# Altium PCB PCB_Prueba_1.PcbDoc
Units mm, origin at the board's own origin, x right, y up, seen from the top; angles counter-clockwise.
Board outline 250.82 x 141.67 mm, 2 copper layers (Top Layer, Bottom Layer); 203 components, 112 nets, 556 pads, 0 vias.
Unrouted connection lines stored in the file: 412.
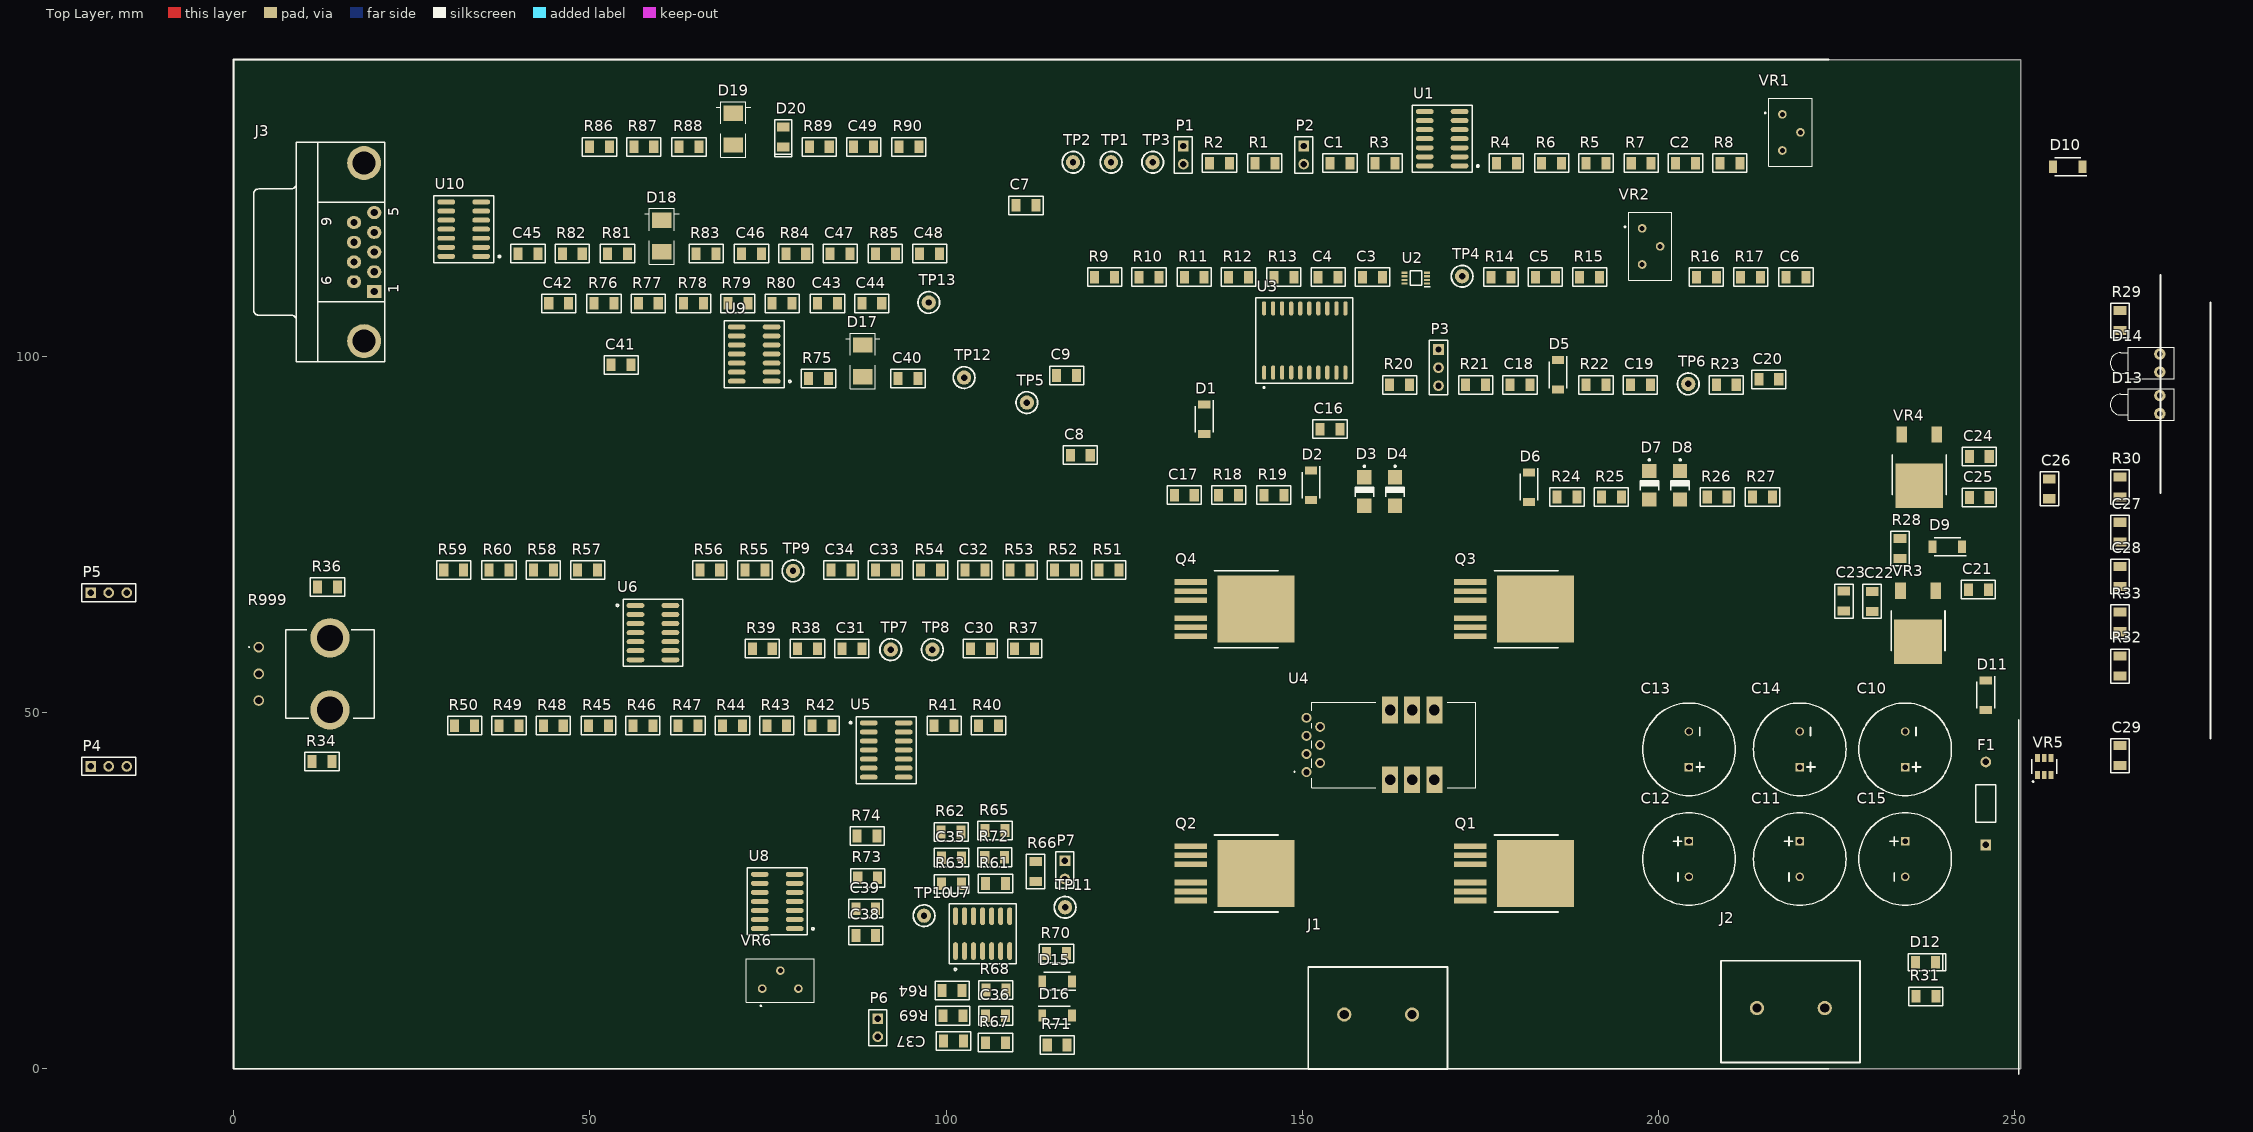
[diagram p0: Top Layer view]
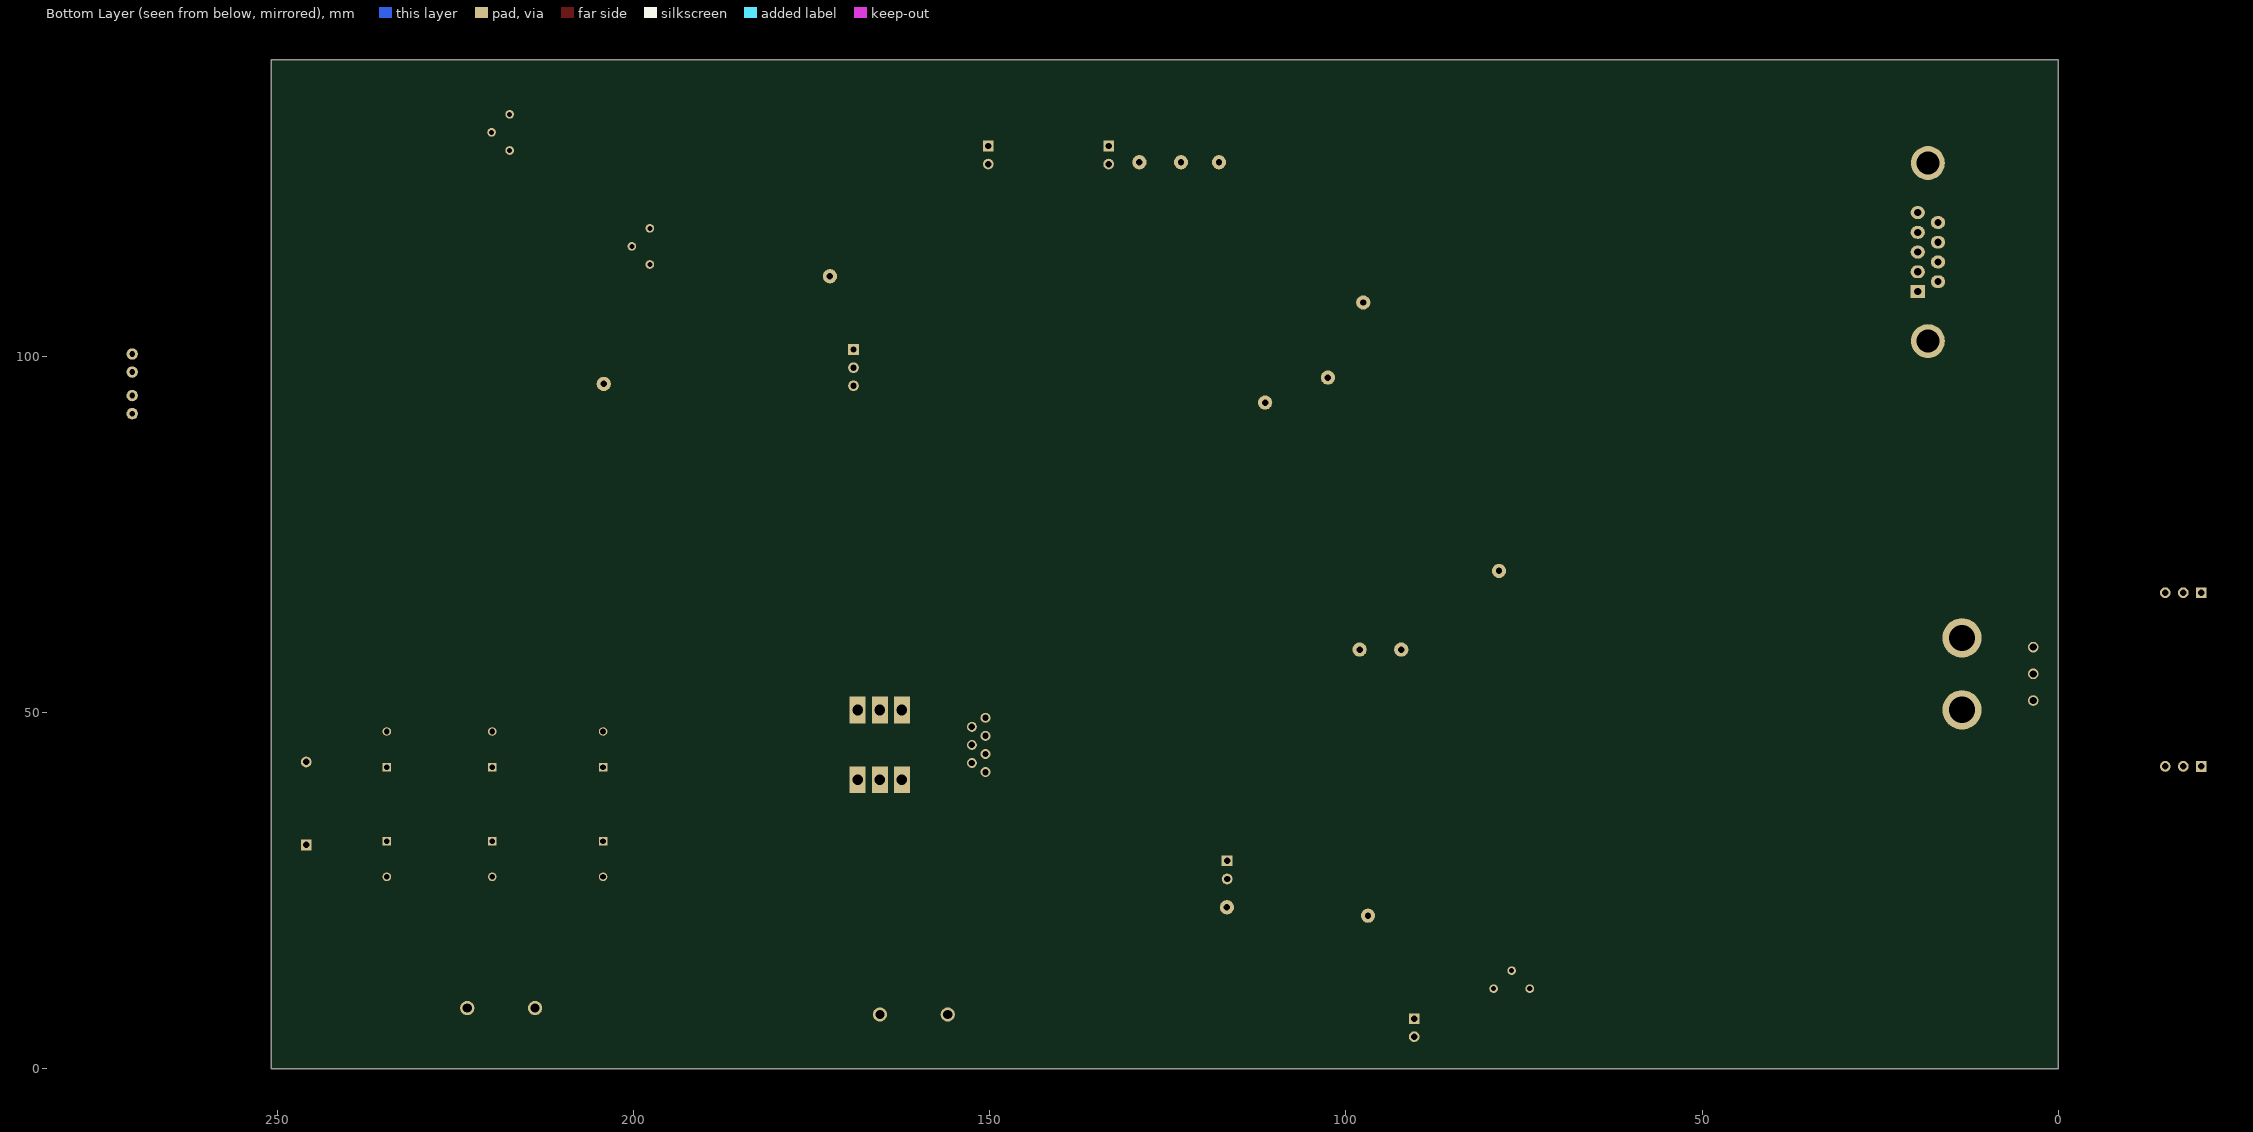
[diagram p1: Bottom Layer view, seen from below]

## Layer stack, top to bottom
Top Solder: solder mask 0.0102, Solder Resist, Dk 3.5
Top Layer: signal copper 0.0356
Dielectric 1: dielectric 0.32, FR-4, Dk 4.8
Bottom Layer: signal copper 0.0356
Bottom Solder: solder mask 0.0102, Solder Resist, Dk 3.5

## Board outline
-0.002,0 -0.002,141.668 250.823,141.668 250.823,0

## Design rules (kind name [scope] priority, off if disabled: settings)
Clearance [All] p1: gap=0.3
PolygonConnect [All] p1: connectstyle=NoConnect reliefconductorwidth=0.254 reliefentries=4 polygonreliefangle="90 Angle" airgapwidth=0.254
RoomDefinition U_Signals2uC [InComponentClass('U_Signals2uC')] p1: confinementstyle=ConfineIn formatcopy=TRUE lockcomponents=FALSE outline 104.686,139.446 0.379,139.446 0.379,87.122 104.686,87.122
RoomDefinition U_Fuentes [InComponentClass('U_Fuentes')] p2: confinementstyle=ConfineIn formatcopy=TRUE lockcomponents=FALSE outline 278.034,34.378 278.034,138.442 250.678,138.442 250.678,34.378
RoomDefinition U_Estimador [InComponentClass('U_Estimador')] p3: confinementstyle=ConfineIn formatcopy=TRUE lockcomponents=FALSE outline 121.55,0.7 68.125,0.7 68.125,36.8 121.55,36.8
RoomDefinition "U_Controlador de corriente  V3" [InComponentClass('U_Controlador de corriente  V3')] p4: confinementstyle=ConfineIn formatcopy=TRUE lockcomponents=FALSE outline 222.883,141.224 106.805,141.224 106.805,75.692 222.883,75.692
RoomDefinition U_Compensador [InComponentClass('U_Compensador')] p5: confinementstyle=ConfineIn formatcopy=TRUE lockcomponents=FALSE outline 28.226,37.888 128.178,37.888 128.178,74.21 28.226,74.21
RoomDefinition Principal [InComponentClass('Principal')] p6: confinementstyle=ConfineIn formatcopy=TRUE lockcomponents=FALSE outline -21.604,68.358 -21.604,40.545 -10.936,40.545 -10.936,68.358
RoutingVias [All] p1: holewidth=0.508 width=0.762 viastyle="Through Hole" minholewidth=0.508 minwidth=0.762 maxholewidth=0.711 maxwidth=1.6
SolderMaskExpansion [All] p1: expansion=0.102
Width [All] p1: maxlimit=1 minlimit=0.3 preferedwidth=0.3
30 further rules are at their usual default settings.

## Classes and differential pairs
component class U_Signals2uC: C40 C41 C42 C43 C44 C45 C46 C47 C48 C49 D17 D18 D19 D20 J3 R75 R76 R77 R78 R79 R80 R81 R82 R83 R84 R85 R86 R87 R88 R89 R90 TP12 TP13 U9 U10
component class U_Fuentes: C21 C22 C23 C24 C25 C26 C27 C28 C29 D9 D10 D11 D12 D13 D14 F1 J2 R28 R29 R30 R31 R32 R33 VR3 VR4 VR5
component class U_Estimador: C35 C36 C37 C38 C39 D15 D16 P6 P7 R61 R62 R63 R64 R65 R66 R67 R68 R69 R70 R71 R72 R73 R74 TP10 TP11 U7 U8 VR6
component class "U_Controlador de corriente  V3": C1 C2 C3 C4 C5 C6 C7 C8 C9 C10 C11 C12 C13 C14 C15 C16 C17 C18 C19 C20 D1 D2 D3 D4 D5 D6 D7 D8 J1 P1 P2 P3 Q1 Q2 Q3 Q4 R1 R2 R3 R4 R5 R6 R7 R8 R9 R10 R11 R12 R13 R14 R15 R16 R17 R18 R19 R20 R21 R22 R23 R24 R25 R26 R27 TP1 TP2 TP3 TP4 TP5 TP6 U1 U2 U3 U4 VR1 VR2
component class U_Compensador: C30 C31 C32 C33 C34 R37 R38 R39 R40 R41 R42 R43 R44 R45 R46 R47 R48 R49 R50 R51 R52 R53 R54 R55 R56 R57 R58 R59 R60 TP7 TP8 TP9 U5 U6
component class Principal: P4 P5 R34 R36 R999

## Components (designator, comment, footprint, x,y, rotation, side; value= is the part's Value field where it differs from the comment)
C1 "Capacitor" C1206 155.282,127.127 r180 top
C2 "Capacitor" C1206 203.796,127.127 r180 top
C3 "Capacitor" C1206 159.854,111.125 r180 top
C4 "Capacitor" C1206 153.631,111.125 r180 top
C5 "Capacitor" C1206 184.111,111.125 r180 top
C6 "Capacitor" C1206 219.29,111.125 r180 top
C7 "Capacitor" C1206 111.21,121.201 r0 top
C8 "Capacitor" C1206 118.836,86.149 r0 top
C9 "Capacitor" C1206 116.928,97.325 r0 top
C10 "EKY-350ELL102MK25S" CAPPRD500W60D1300H2650 234.625,42.35 r90 top
C11 "EKY-350ELL102MK25S" CAPPRD500W60D1300H2650 219.825,31.95 r270 top
C12 "EKY-350ELL102MK25S" CAPPRD500W60D1300H2650 204.275,31.95 r270 top
C13 "EKY-350ELL102MK25S" CAPPRD500W60D1300H2650 204.275,42.35 r90 top
C14 "EKY-350ELL102MK25S" CAPPRD500W60D1300H2650 219.825,42.35 r90 top
C15 "EKY-350ELL102MK25S" CAPPRD500W60D1300H2650 234.625,31.95 r270 top
C16 "Capacitor" C1206 153.885,89.789 r180 top
C17 "Capacitor" C1206 133.438,80.518 r180 top
C18 "Capacitor" C1206 180.555,96.012 r180 top
C19 "Capacitor" C1206 197.446,96.012 r180 top
C20 "Capacitor" C1206 215.48,96.774 r180 top
C21 "Capacitor" C1206 244.9,67.25 r180 top
C22 "Capacitor" C1206 230,65.625 r90 top
C23 "Capacitor" C1206 226.025,65.65 r90 top
C24 "Capacitor" C1206 245.025,85.95 r180 top
C25 "Capacitor" C1206 245.025,80.2 r180 top
C26 "Capacitor" C1206 254.869,81.419 r90 top
C27 "Capacitor" C1206 264.775,75.323 r90 top
C28 "Capacitor" C1206 264.775,69.1 r90 top
C29 "Capacitor" C1206 264.775,43.954 r90 top
C30 "Capacitor" C1206 104.807,58.97 r0 top
C31 "Capacitor" C1206 86.773,58.97 r0 top
C32 "Capacitor" C1206 104.045,70.019 r0 top
C33 "Capacitor" C1206 91.472,70.019 r0 top
C34 "Capacitor" C1206 85.249,70.019 r0 top
C35 "Capacitor" C1206 100.755,29.65 r0 top
C36 "Capacitor" C1206 106.955,7.45 r0 top
C37 "Capacitor" C1206 101.03,3.9 r180 top
C38 "Capacitor" C1206 88.725,18.725 r180 top
C39 "Capacitor" C1206 88.725,22.475 r0 top
C40 "Capacitor" C1206 94.653,96.901 r180 top
C41 "Capacitor" C1206 54.394,98.806 r180 top
C42 "Capacitor" C1206 45.628,107.442 r180 top
C43 "Capacitor" C1206 83.347,107.442 r180 top
C44 "Capacitor" C1206 89.57,107.442 r180 top
C45 "Capacitor" C1206 41.31,114.427 r180 top
C46 "Capacitor" C1206 72.679,114.427 r180 top
C47 "Capacitor" C1206 85.125,114.427 r180 top
C48 "Capacitor" C1206 97.698,114.427 r180 top
C49 "Capacitor" C1206 88.427,129.413 r180 top
D1 "RSX205LAM30TR" SODFL4725X105N 136.232,91.186 r270 top
D2 "RSX205LAM30TR" SODFL4725X105N 151.218,81.915 r270 top
D3 "SMAJ15A" ONSC-SMA-2-403D-02_F_V 158.711,81.026 r270 top
D4 "SMAJ15A" ONSC-SMA-2-403D-02_F_V 163.029,81.026 r270 top
D5 "RSX205LAM30TR" SODFL4725X105N 185.889,97.409 r270 top
D6 "RSX205LAM30TR" SODFL4725X105N 181.825,81.661 r270 top
D7 "SMAJ15A" ONSC-SMA-2-403D-02_F_V 198.716,81.915 r270 top
D8 "SMAJ15A" ONSC-SMA-2-403D-02_F_V 203.034,81.915 r270 top
D9 "RSX205LAM30TR" SODFL4725X105N 240.55,73.275 r180 top
D10 "RSX205LAM30TR" SODFL4725X105N 257.452,126.628 r180 top
D11 "RSX205LAM30TR" SODFL4725X105N 245.95,52.45 r270 top
D12 "LED" "LED 1206 RED" 237.5,14.975 r0 top
D13 "LED" LED-1 270.363,93.23 r180 top
D14 "LED" LED-1 270.363,99.072 r180 top
D15 "RSX205LAM30TR" SODFL4725X105N 115.575,12.275 r180 top
D16 "RSX205LAM30TR" SODFL4725X105N 115.575,7.5 r0 top
D17 "Diodo Zener" SMB 88.303,97.155 r270 top
D18 "Diodo Zener" SMB 60.106,114.681 r270 top
D19 "Diodo Zener" SMB 70.139,129.667 r270 top
D20 "LED" "LED 1206 RED" 77.124,130.81 r270 top
F1 "Fuse" PIN-W2/E2.8 245.95,37.25 r90 top
J1 "Header 2" SMKDS5-2-9.5 160.653,7.62 r0 top
J2 "Header 2" SMKDS5-2-9.5 218.575,8.525 r0 top
J3 "DB9H" DB9H 19.729,109.105 r90 top
P1 "Header 2" HDR1X2 133.311,129.54 r270 top
P2 "Header 2" HDR1X2 150.202,129.54 r270 top
P3 "Header 3" HDR1X3 169.125,100.965 r270 top
P4 "Header 3" HDR1X3 -20.08,42.45 r0 top
P5 "Header 3" HDR1X3 -20.08,66.834 r0 top
P6 "Header 2" HDR1X2 90.425,7.05 r270 top
P7 "Header 2" HDR1X2 116.68,29.19 r270 top
Q1 "IPB160N04" TO263-7S 182.727,27.432 r270 top
Q2 "IPB160N04" TO263-7S 143.484,27.432 r270 top
Q3 "IPB160N04" TO263-7S 182.727,64.516 r270 top
Q4 "IPB160N04" TO263-7S 143.484,64.516 r270 top
R1 "3k2" R1206 144.741,127.127 r180 top
R2 "10k" R1206 138.391,127.127 r180 top
R3 "10k" R1206 161.632,127.127 r180 top
R4 "500" R1206 178.65,127.127 r180 top
R5 "4k7" R1206 191.223,127.127 r180 top
R6 "15k" R1206 185,127.127 r180 top
R7 "10k" R1206 197.573,127.127 r180 top
R8 "10k" R1206 210.019,127.127 r180 top
R9 "10k" R1206 122.262,111.125 r180 top
R10 "200k" R1206 128.485,111.125 r180 top
R11 "2k" R1206 134.835,111.125 r180 top
R12 "500" R1206 141.058,111.125 r180 top
R13 "1k" R1206 147.408,111.125 r180 top
R14 "1k" R1206 177.888,111.125 r180 top
R15 "1k" R1206 190.334,111.125 r180 top
R16 "1k" R1206 206.717,111.125 r180 top
R17 "1k" R1206 212.94,111.125 r180 top
R18 "4k7" R1206 139.661,80.518 r180 top
R19 "4k7" R1206 146.011,80.518 r180 top
R20 "230k" R1206 163.664,96.012 r180 top
R21 "230k" R1206 174.332,96.012 r180 top
R22 "100K" R1206 191.223,96.012 r180 top
R23 "10k" R1206 209.511,96.012 r180 top
R24 "4k7" R1206 187.159,80.264 r180 top
R25 "4k7" R1206 193.382,80.264 r180 top
R26 "0R" R1206 208.241,80.264 r180 top
R27 "1k" R1206 214.591,80.264 r180 top
R28 "0R" R1206 233.9,73.05 r270 top
R29 "0R" R1206 264.775,105.041 r90 top
R30 "4k7" R1206 264.775,81.673 r90 top
R31 "2.37K" R1206 237.525,10.175 r0 top
R32 "1k" R1206 264.775,56.527 r90 top
R33 "300" R1206 264.775,62.75 r90 top
R34 "374" R1206 12.4,43.14 r0 top
R36 "4k3" R1206 13.175,67.64 r180 top
R37 "1M" R1206 111.03,58.97 r0 top
R38 "1k" R1206 80.55,58.97 r0 top
R39 "1k" R1206 74.2,58.97 r0 top
R40 "1k" R1206 105.95,48.175 r0 top
R41 "1k" R1206 99.727,48.175 r0 top
R42 "1k" R1206 82.582,48.175 r0 top
R43 "1k" R1206 76.232,48.175 r0 top
R44 "1k" R1206 70.009,48.175 r0 top
R45 "1k" R1206 51.213,48.175 r0 top
R46 "1k" R1206 57.436,48.175 r0 top
R47 "1k" R1206 63.786,48.175 r0 top
R48 "1k" R1206 44.863,48.175 r0 top
R49 "100k" R1206 38.64,48.175 r0 top
R50 "100k" R1206 32.417,48.175 r0 top
R51 "221" R1206 122.841,70.019 r0 top
R52 "221" R1206 116.618,70.019 r0 top
R53 "4k3" R1206 110.395,70.019 r0 top
R54 "4k3" R1206 97.822,70.019 r0 top
R55 "800k" R1206 73.184,70.019 r0 top
R56 "100k" R1206 66.834,70.019 r0 top
R57 "100k" R1206 49.689,70.019 r0 top
R58 "1k" R1206 43.466,70.019 r0 top
R59 "1k" R1206 30.893,70.019 r0 top
R60 "800k" R1206 37.243,70.019 r0 top
R61 "3.56K" R1206 106.93,26.025 r180 top
R62 "100K" R1206 100.705,33.25 r180 top
R63 "100K" R1206 100.755,25.975 r0 top
R64 "10K" R1206 100.855,11 r180 top
R65 "3.56K" R1206 106.88,33.45 r0 top
R66 "100K" R1206 112.58,27.7 r270 top
R67 "10K" R1206 106.93,3.675 r0 top
R68 "10K" R1206 106.98,11.075 r180 top
R69 "10K" R1206 100.955,7.45 r0 top
R70 "1.8M" R1206 115.5,16.2 r0 top
R71 "1.8M" R1206 115.6,3.35 r0 top
R72 "3.56K" R1206 106.83,29.7 r180 top
R73 "100K" R1206 89,26.8 r0 top
R74 "10K" R1206 88.925,32.675 r180 top
R75 "10k" R1206 82.08,96.901 r180 top
R76 "10k" R1206 51.978,107.442 r180 top
R77 "10k" R1206 58.201,107.442 r180 top
R78 "12k" R1206 64.551,107.442 r180 top
R79 "1k" R1206 70.774,107.442 r180 top
R80 "10k" R1206 76.997,107.442 r180 top
R81 "1k" R1206 53.883,114.427 r180 top
R82 "10k" R1206 47.533,114.427 r180 top
R83 "10k" R1206 66.329,114.427 r180 top
R84 "1k" R1206 78.902,114.427 r180 top
R85 "10k" R1206 91.475,114.427 r180 top
R86 "10k" R1206 51.343,129.413 r180 top
R87 "10k" R1206 57.566,129.413 r180 top
R88 "10k" R1206 63.916,129.413 r180 top
R89 "10k" R1206 82.204,129.413 r180 top
R90 "2.37K" R1206 94.777,129.413 r180 top
R999 "Potenciometro" pote_5_pines_vertical 13.525,55.44 r270 top
TP1 "V_Hist" "TestPoint Keystone 5000 Silver-Red" 123.151,127.254 r180 top
TP2 "Vout_osc_HF" "TestPoint Keystone 5000 Silver-Red" 117.817,127.254 r180 top
TP3 "GND" "TestPoint Keystone 5000 Silver-Red" 128.993,127.254 r180 top
TP4 "Vi_Feed" "TestPoint Keystone 5000 Silver-Red" 172.427,111.252 r180 top
TP5 "BHB" "TestPoint Keystone 5000 Silver-Red" 111.34,93.515 r0 top
TP6 "AHB" "TestPoint Keystone 5000 Silver-Red" 204.177,96.139 r180 top
TP7 "Verror1" "TestPoint Keystone 5000 Silver-Red" 92.234,58.843 r0 top
TP8 "Verror2" "TestPoint Keystone 5000 Silver-Red" 98.076,58.843 r0 top
TP9 "Vcomp_A" "TestPoint Keystone 5000 Silver-Red" 78.518,69.892 r0 top
TP10 "Vpos_Est_A" "TestPoint Keystone 5000 Silver-Red" 96.905,21.5 r180 top
TP11 "Vder" "TestPoint Keystone 5000 Silver-Red" 116.705,22.675 r90 top
TP12 "Vcomp_D" "TestPoint Keystone 5000 Silver-Red" 102.527,97.028 r270 top
TP13 "Vpos_Est_D" "TestPoint Keystone 5000 Silver-Red" 97.571,107.569 r270 top
U1 "MCP664" SOIC14 169.633,131.191 r180 top
U2 "SN74LVC3G06DCUT" SOP50P310X90-8N 165.95,110.998 r180 top
U3 "HIP4081A" SOIC20 150.342,102.235 r90 top
U4 "HO_15-NP-0000" HO15NP0000 150.596,41.656 r0 top
U5 "MCP664" SOIC14 91.599,44.111 r0 top
U6 "MCP664" SOIC14 58.855,60.595 r0 top
U7 "MCP664" SOIC14 105.76,18.975 r90 top
U8 "MCP664" SOIC14 76.3,24.13 r180 top
U9 "MCP664" SOIC14 73.063,100.965 r180 top
U10 "MCP664" SOIC14 32.293,118.491 r180 top
VR1 "Trimmer (Thru-Hole)" 3299Y1203LF 217.385,133.985 r180 top
VR2 "Trimmer (Thru-Hole)" 3299Y1203LF 197.7,117.983 r180 top
VR3 "L78M12" TO252-AA 236.45,59.95 r180 top
VR4 "L78M05" TO252-AA 236.6,81.85 r180 top
VR5 "MAX6071" SOT23-6 254.15,42.45 r90 top
VR6 "Trimmer (Thru-Hole)" 3299Y1203LF 74.195,11.25 r270 top

## Footprints (in the part's own frame and the unit in brackets; to place one, negate y for a bottom-side part, rotate by r counter-clockwise, add the part's x,y. Pads: shape width x height; smd on the part's side, far side on the other; paste and mask are expansions set on the pad)
3299Y1203LF [mm]
  round 1.217 hole 0.71: 1(0,0) 2(-2.54,2.54) 3(0,5.08)
  silkscreen extent -4.19,-2.22 2.5,7.3, body extent -4.19,-2.22 1.91,7.3, height 11.65
C1206 [mm]
  rect 1.27x1.778 smd: 1(-1.4,0) 2(1.4,0)
  silkscreen extent -2.4,-1.3 2.4,1.3, body extent -1.6,-0.8 1.6,0.8, height 1
CAPPRD500W60D1300H2650 [mm]
  rect 1.2x1.2 hole 0.8: 1(0,0)
  round 1.2 hole 0.8: 2(5,0)
  silkscreen extent -4,-6.5 9,6.5, body extent -4,-6.5 9,6.5, height 26.5
DB9H [mm]
  rect 1.8x2 hole 1: 1(0,0)
  oval 1.8x2 hole 1: 2(2.77,0) 3(5.54,0) 4(8.31,0) 5(11.08,0) 6(1.385,2.84) 7(4.155,2.84) 8(6.925,2.84) 9(9.695,2.84)
  round 4.76 hole 3.26: 10(-6.955,1.42) 11(18.035,1.42)
  silkscreen extent -9.86,-1.48 20.94,16.92, body extent -9.84,-2.08 20.97,16.99, height 12.58
HDR1X2 [mm]
  rect 1.5x1.5 hole 0.9: 1(0,0)
  round 1.5 hole 0.9: 2(2.54,0)
  silkscreen extent -1.27,-1.27 3.81,1.27, body extent -1.27,-1.27 3.81,1.27, height 8.54
HDR1X3 [mm] "Connector; Header; 3 Position"
  rect 1.5x1.5 hole 0.9: 1(0,0)
  round 1.5 hole 0.9: 2(2.54,0) 3(5.08,0)
  silkscreen extent -1.27,-1.27 6.35,1.27, body extent -1.27,-1.27 6.35,1.27, height 8.54
HO15NP0000 [mm]
  round 1.4 hole 0.9: 1(0,0) 2(1.905,1.27) 3(0,2.54) 4(1.905,3.81) 5(0,5.08) 6(1.905,6.35) 7(0,7.62)
  rect 2.25x3.75 hole 1.5: 8(11.735,8.71) 9(14.835,8.71) 10(17.935,8.71) 11(17.935,-1.09) 12(14.835,-1.09) 13(11.735,-1.09)
  silkscreen extent -1.75,-2.19 23.75,9.81, body extent -0.18,-2.21 23.75,9.79, height 11.9
"LED 1206 RED" [mm] "Led SMD 1206"
  rect 1.27x1.778 smd: 1(-1.4,0) 2(1.4,0)
  silkscreen extent -2.41,-1.2 2.79,1.2, body extent -1.66,-0.78 1.75,0.81, height 0.5
LED-1 [mm] "LED; 2 Leads"
  round 1.6 hole 0.8: 1(0,1.27) 2(0,-1.27)
  silkscreen extent -2,-2.2 6.95,2.2
ONSC-SMA-2-403D-02_F_V [mm] "Molded, 2-Leads, Body 4.32x2.6mm"
  rect 2x2 smd: 1(-2,0) 2(2,0)
  silkscreen extent -3.67,-1.3 0.74,1.3, body extent -2.16,-1.3 2.16,1.3, height 2.2
PIN-W2/E2.8 [mm] "Thru-Hole; 2 Leads"
  rect 1.5x1.5 hole 0.9: 1(-5.825,0)
  round 1.5 hole 0.9: 2(5.825,0)
  silkscreen extent -2.65,-1.4 2.65,1.4
pote_5_pines_vertical [mm]
  round 1.5 hole 1: 1(-3.75,-10) 2(0,-10) 3(3.75,-10)
  round 5.52 hole 3.68: GND(-5.05,0) GND(5.05,0)
  silkscreen extent -6.2,-11.4 6.2,6.2, body extent -6.79,-10.4 6.79,6.2, height 25.1
R1206 [mm]
  rect 1.27x1.778 smd: 1(-1.4,0) 2(1.4,0)
  silkscreen extent -2.4,-1.3 2.4,1.3, body extent -1.6,-0.8 1.6,0.8, height 1
SMB [mil] "Para diodos como  4007, supresores, etc"
  rect 85x108 smd: 1(0,0) 2(-175,0)
  silkscreen extent -240,-95 68,95, body extent -194,-55 14,55, height 92
SMKDS5-2-9.5 [mm] "Phoenix Contact; Terminal block; 2way; 32A max; 9.52mm pitch; 135°"
  round 2 hole 1.3: 1(-4.76,0) 2(4.76,0)
  silkscreen extent -9.8,-7.65 9.73,6.65, body extent -10.08,-7.5 9.53,11, height 21.5
SODFL4725X105N [mm]
  rect 1.12x1.72 smd: 1(-2.075,0) 2(2.075,0)
  silkscreen extent -2.64,-1.25 1.85,1.25, body extent -2.35,-1.25 2.35,1.25, height 1.05
SOIC14 [mm]
  oval 2.5x0.7 smd: 1(-2.45,4.445) 2(-2.45,3.175) 3(-2.45,1.905) 4(-2.45,0.635) 5(-2.45,-0.635) 6(-2.45,-1.905) 7(-2.45,-3.175) 8(2.45,-3.175) 9(2.45,-1.905) 10(2.45,-0.635) 11(2.45,0.635) 12(2.45,1.905) 13(2.45,3.175) 14(2.45,4.445)
  silkscreen extent -5.16,-4.06 4.19,5.33, body extent -3.12,-3.68 3.07,4.95, height 1.7
SOIC20 [mm]
  oval 2x0.6 smd: 1(-4.5,5.715) 2(-4.5,4.445) 3(-4.5,3.175) 4(-4.5,1.905) 5(-4.5,0.635) 6(-4.5,-0.635) 7(-4.5,-1.905) 8(-4.5,-3.175) 9(-4.5,-4.445) 10(-4.5,-5.715) 11(4.5,-5.715) 12(4.5,-4.445) 13(4.5,-3.175) 14(4.5,-1.905) 15(4.5,-0.635) 16(4.5,0.635) 17(4.5,1.905) 18(4.5,3.175) 19(4.5,4.445) 20(4.5,5.715)
  silkscreen extent -6.68,-6.73 5.97,6.86, body extent -5.31,-6.5 5.31,6.5, height 2.66
SOP50P310X90-8N [mm]
  rect 0.85x0.3 smd: 1(-1.575,0.75) 2(-1.575,0.25) 3(-1.575,-0.25) 4(-1.575,-0.75) 5(1.575,-0.75) 6(1.575,-0.25) 7(1.575,0.25) 8(1.575,0.75)
  silkscreen extent -2,-1 0.8,1.25, body extent -1.55,-1 1.55,1, height 0.77
SOT23-6 [mm]
  rect 1.1x0.65 smd: 1(-1.2,0.95) 2(-1.2,0) 3(-1.2,-0.95) 4(1.2,-0.95) 5(1.2,0) 6(1.2,0.95)
  silkscreen extent -2.19,-1.75 1,1.75, body extent -1.5,-1.5 1.5,1.5, height 1.39
"TestPoint Keystone 5000 Silver-Red" [mm]
  round 2 hole 0.9: 1(0,0)
  silkscreen extent -1.52,-1.52 1.51,1.52, body extent -1.27,-1.27 1.27,1.27, height 4.89
TO252-AA [mil]
  rect 60x89 smd: 1(-97,-282) 3(97,-282)
  rect 265x245 smd: 4(0,0)
  silkscreen extent -149,-169 149,48, body extent -133,-291 133,107, height 156
TO263-7S [mm]
  rect 0.8x4.6 smd: 1(-3.81,-9.15) 2(-2.54,-9.15) 3(-1.27,-9.15) 5(1.27,-9.15) 6(2.54,-9.15) 7(3.81,-9.15)
  rect 9.4x10.8 smd: 4(0,0)
  silkscreen extent -5.41,-5.79 5.41,3.15, body extent -5.03,-10.97 4.97,4.7, height 4.78

## Part data
C10 C11 C12 C13 C14 C15: "Capacitor Polarised"
D1 D2 D5 D6 D9 D10 D11 D15 D16: "Schottky Diode"
D3 D4 D7 D8: library part 1SMA60CAT3G, "400 W Peak Power Zener Transient Voltage Suppressor, 2-Pin SMA, Pb-Free, Tape and Reel"
D12 D13 D14 D20: "Typical RED GaAs LED"
D17 D18 D19: "SZ1SMB5915BT3G"
J1 J2 P1 P2 P6 P7: "Header, 2-Pin"
P3 P4 P5: "Header, 3-Pin"
Q1 Q2 Q3 Q4: "HEXFET N-Channel Power MOSFET"
R1 R2 R3 R4 R5 R6 R7 R8 R9 R10 R11 R12 R13 R14 R15 R16 R17 R18 R19 R20 R21 R22 R23 R24 R25 R26 R27 R28 R29 R30 R31 R32 R33 R34 R36 R37 R38 R39 R40 R41 R42 R43 R44 R45 R46 R47 R48 R49 R50 R51 R52 R53 R54 R55 R56 R57 R58 R59 R60 R61 R62 R63 R64 R65 R66 R67 R68 R69 R70 R71 R72 R73 R74 R75 R76 R77 R78 R79 R80 R81 R82 R83 R84 R85 R86 R87 R88 R89 R90: library part R1206, "Resistor Chip; 1/8W;"
R999: "Vertical - 5 pines"
TP1 TP2 TP3 TP4 TP5 TP6 TP7 TP8 TP9 TP10 TP11 TP12 TP13: library part Testpoint
U2: "Schmitt-Trigger Inverter"
U3: "INTERSIL, 80V, 2.5A peak, High Frequency Full Bridge FET Driver"
U4: "Integrated Circuit"
VR1 VR2 VR6: library part Trimmer, "Res Cermet Trimmer 500K Ohm 10% 0.5W 25(Elec)Turn 2.19mm (9.53 X 4.83 X 11.55mm) Pin Thru-Hole Tube"
VR3 VR4: library part "Volt Reg", "Voltage Regulator"
VR5: library part MAX6070

## Nets (pads, with @x,y where several pads share a name; then routed paths per layer and width w, separated by ;. In a path a pad name is that pad's centre, name@x,y a point inside that pad or via, vN(x,y) a via of type N, cw(c..) or ccw(c..) an arc to the next point about the centre after c; other vN are vias at no path point)
+2.5V: C27.2 J3.2 R11.1 R15.1 R38.2 R39.2 R44.1 R55.2 R73.1 R81.2 R87.1 U6.3 U6.5 U7.10 U8.3 VR2.3 VR5.5 VR5.6
+2.6V: C3.2 C4.2 C17.1 R1.2 U4.4 VR1.2
+5.0V: C20.2 R22.2 R26.2 R71.1 U4.1
+5V: C5.2 C26.2 C28.2 C31.1 C32.2 C43.1 D10.2 D14.1 R29.2 R34.2 U1.4 U2.8 U5.4 U6.4 U7.4 U8.4 U9.4 U10.4 VR1.1 VR4.3
+12V: C7.2 C8.2 C9.2 C18.2 C22.2 C23.2 D1.2 D2.2 D5.1 D9.2 D13.1 P3.3 R28.2 U3.15 U3.16 VR3.3
+24V: C10.1 C11.1 C12.1 C13.1 C14.1 C15.1 D12.1 F1.1 J2.1 Q1.4 Q2.4
AHB: C19.2 D2.1 TP6.1 U3.10
AHO: D4.1 Q2.1 R18.1 U3.11
AHS: C19.1 D4.2 J1.2 Q2.2 Q2.3 Q2.5 Q2.6 Q2.7 Q4.4 R18.2 U3.12
AHS2: J1.1 U4.8 U4.9 U4.10
ALO: D7.1 Q4.1 R24.1 U3.13
BHB: C6.2 D1.1 TP5.1 U3.1
BHI/ALI: U2.3 U2.7 U3.2 U3.6
BHO: D3.1 Q1.1 R19.2 U3.20
BHS: C6.1 U3.19
BLI/AHI: P2.2 U2.1
BLO: D8.1 Q3.1 R25.2 U3.18
D\I\S\A\B\L\E\: C18.1 D5.2 D6.1 P3.2 R23.2 U3.3
GND: C1.2 C2.2 C3.1 C4.1 C7.1 C8.1 C9.1 C10.2 C11.2 C12.2 C13.2 C14.2 C15.2 C16.1 C17.2 C20.1 C21.1 C22.1 C23.1 C24.1 C25.1 C26.1 C27.1 C28.1 C29.1 C31.2 C32.1 C33.2 C34.1 C38.2 C39.1 C40.1 C43.2 C47.1 C49.2 D6.2 D7.2 D8.2 D17.1 D18.1 D19.1 J2.2 J3.3 J3.7 J3.10 J3.11 Q3.2 Q3.3 Q3.5 Q3.6 Q3.7 Q4.2 Q4.3 Q4.5 Q4.6 Q4.7 R5.1 R13.1 R17.1 R20.2 R21.2 R23.1 R24.2 R25.1 R27.1 R31.1 R32.2 R33.1 R36.1 R48.1 R59.1 R70.1 R76.1 R82.1 R89.1 R90.1 TP3.1 U1.11 U2.4 U3.4 U3.14 U3.17 U4.2 U4.7 U5.11 U6.11 U7.11 U8.11 U9.11 U10.11 VR5.2
HDEL: R20.1 U3.8
LDEL: R21.1 U3.9
NetC2_1: C2.1 R2.1 R6.2 U1.9
NetC21_2: C21.2 D9.1 D11.1 VR3.1
NetC24_2: C24.2 C25.2 D10.1 R28.1 VR4.1
NetC29_2: C29.2 VR5.1
NetC30_2: C30.2 R37.1 R42.2 U5.2
NetC33_1: C33.1 R51.1
NetC34_2: C34.2 R52.1
NetC35_2: C35.2 R62.2 R63.2 U7.13
NetC36_1: C36.1 P6.2 U7.5 U7.7
NetC36_2: C36.2 R67.2 R68.1
NetC37_1: C37.1 P6.1
NetC37_2: C37.2 R69.1
NetC38_1: C38.1 R68.2 U7.6
NetC39_2: C39.2 R66.2 R73.2 U7.12
NetC41_2: C41.2 R76.2 R77.1 U10.6
NetC42_2: C42.2 R78.1 R79.2 U10.2
NetC44_1: C44.1 R79.1
NetC45_2: C45.2 R82.2 R83.1 U10.9
NetC46_2: C46.2 R84.1
NetC47_2: C47.2 R81.1 R84.2 U10.3
NetC48_2: C48.2 R86.1 R87.2 U10.13
NetC49_1: C49.1 R88.2 R89.2 U10.12
NetD3_2: D3.2 Q1.2 Q1.3 Q1.5 Q1.6 Q1.7 Q3.4 R19.1 U4.11 U4.12 U4.13
NetD11_2: D11.2 F1.2
NetD12_2: D12.2 R31.2
NetD13_2: D13.2 R32.1
NetD14_2: D14.2 R33.2
NetD15_1: D15.1 R65.2 R66.1 R70.2
NetD15_2: D15.2 D16.1 U7.8
NetD20_2: D20.2 R90.2
NetP7_1: P7.1 R72.1
NetR1_1: R1.1 R3.2 R5.2 U1.6
NetR4_2: R4.2 U1.2
NetR7_1: R7.1 R8.2 U1.5
NetR9_1: R9.1 R11.2 U1.10
NetR10_1: R10.1 R12.2 U1.3
NetR12_1: R12.1 VR2.1 VR2.2
NetR13_2: R13.2 VR1.3
NetR14_1: R14.1 R15.2 U1.13
NetR16_2: R16.2 R17.2 U1.12
NetR22_1: R22.1 U4.5
NetR29_1: R29.1 R30.2 VR5.4
NetR30_1: R30.1 VR5.3
NetR34_1: R34.1 R999.1
NetR38_1: R38.1 R40.2 U5.13
NetR39_1: R39.1 R41.2 U5.6
NetR43_2: R43.2 R47.1 U5.12
NetR44_2: R44.2 R48.2 U5.3
NetR45_1: R45.1 U5.8 U5.10
NetR45_2: R45.2 R46.1 U5.5
NetR49_1: R49.1 R57.2 U6.2
NetR49_2: R49.2 R52.2 R54.2
NetR50_1: R50.1 R56.2 U6.6
NetR50_2: R50.2 R51.2 R53.2
NetR53_1: R53.1 R57.1 U6.7
NetR54_1: R54.1 R58.1 U6.1
NetR55_1: R55.1 R58.2 U6.9
NetR59_2: R59.2 R60.1 U6.10
NetR61_1: R61.1 R65.1 R72.2 U7.9
NetR64_1: R64.1 R69.2 U7.2
NetR74_2: R74.2 U8.2 VR6.1
NetR75_1: R75.1 U9.6 U9.7
NetR80_2: R80.2 U10.5
NetR85_2: R85.2 U10.10
NetU2_5: U2.5 U3.5 U3.7
PRESENCIA_PLACA: D20.1 J3.8
STANDBY: R26.1 R27.2
V_HALL: C16.2 R16.1 R74.1 U4.3
V_HIST: P1.1 R10.2 TP1.1 U1.1
V_I*R: U7.3 U8.1 VR6.2 VR6.3
VCOMP_A: P4.1 R60.2 TP9.1 U6.8
VCOMP_D: C41.1 P4.3 R77.2 TP12.1 U10.7
VCOMP_DAC: J3.1 R80.1
VDER: P7.2 R64.2 TP11.1 U7.1
VERROR1: R42.1 R46.2 TP7.1 U5.7
VERROR2: R47.2 R56.1 TP8.1 U5.14
"VI_ ERROR": R4.1 R7.2 U1.7
VI_FEED: C46.1 R8.1 R14.2 R67.1 TP4.1 U1.14 U9.5
VI_FEED_ADC: C42.1 D18.2 J3.5 R78.2 U10.1
VI_FEED_VALOR_MEDIO_ADC: C40.2 D17.2 J3.4 R75.2
VI_REF: P4.2 R3.1
VIN_OSC_HF: P1.2 R6.1
VINTEGRADOR: C30.1 R37.2 R43.1 U5.1
VOUT_OSC_HF: P2.1 R2.2 R9.2 TP2.1 U1.8
VPOS_EST: P5.2 R40.1 R41.1
VPOS_EST_A: C35.1 P5.1 R63.1 TP10.1 U7.14
VPOS_EST_D: C45.1 P5.3 R83.2 TP13.1 U10.8
VPOS_EST_DAC: J3.6 R85.1
VPOS_REF: R36.2 R88.1 R999.2 R999.3 U5.9
VPOS_REF_ADC: C48.1 D19.2 J3.9 R86.2 U10.14
VPST: D16.2 R61.2 R62.1 R71.2
pads on no net: C1.1 C5.1 C44.2 P3.1 R999.GND U2.2 U2.6 U4.6 U6.12 U6.13 U6.14 U8.5 U8.6 U8.7 U8.8 U8.9 U8.10 U8.12 U8.13 U8.14 U9.1 U9.2 U9.3 U9.8 U9.9 U9.10 U9.12 U9.13 U9.14 VR3.4 VR4.4

## Silkscreen, mask and mechanical layers (free items; w line width, h text height)
Top Overlay:
  lines w0.254: 223.899,0 -0.002,0 -0.002,141.668 223.899,141.668 ; 250.569,-0.762 250.569,48.99 ; 270.473,80.816 270.473,111.455 ; 277.475,46.332 277.475,107.61

## Text inside footprints (layer, text, board x,y; h text height)
J3: Top Overlay "6" at 13.784,109.99 h1.5 r90; Top Overlay "9" at 13.784,118.3 h1.5 r90; Top Overlay "5" at 23.184,119.685 h1.5 r90; Top Overlay "1" at 23.184,108.855 h1.5 r90; Mechanical 29 "1" at 23.184,108.855 h1.5 r90; Mechanical 29 "5" at 23.184,119.685 h1.5 r90; Mechanical 29 "9" at 13.784,118.3 h1.5 r90; Mechanical 29 "6" at 13.784,109.99 h1.5 r90